# Altium PCB PCB1.PcbDoc
Units mil, origin at the board's own origin, x right, y up, seen from the top; angles counter-clockwise.
Board outline 2955 x 3545 mil, 2 copper layers (Top Layer, Bottom Layer); 51 components, 28 nets, 169 pads, 50 vias.
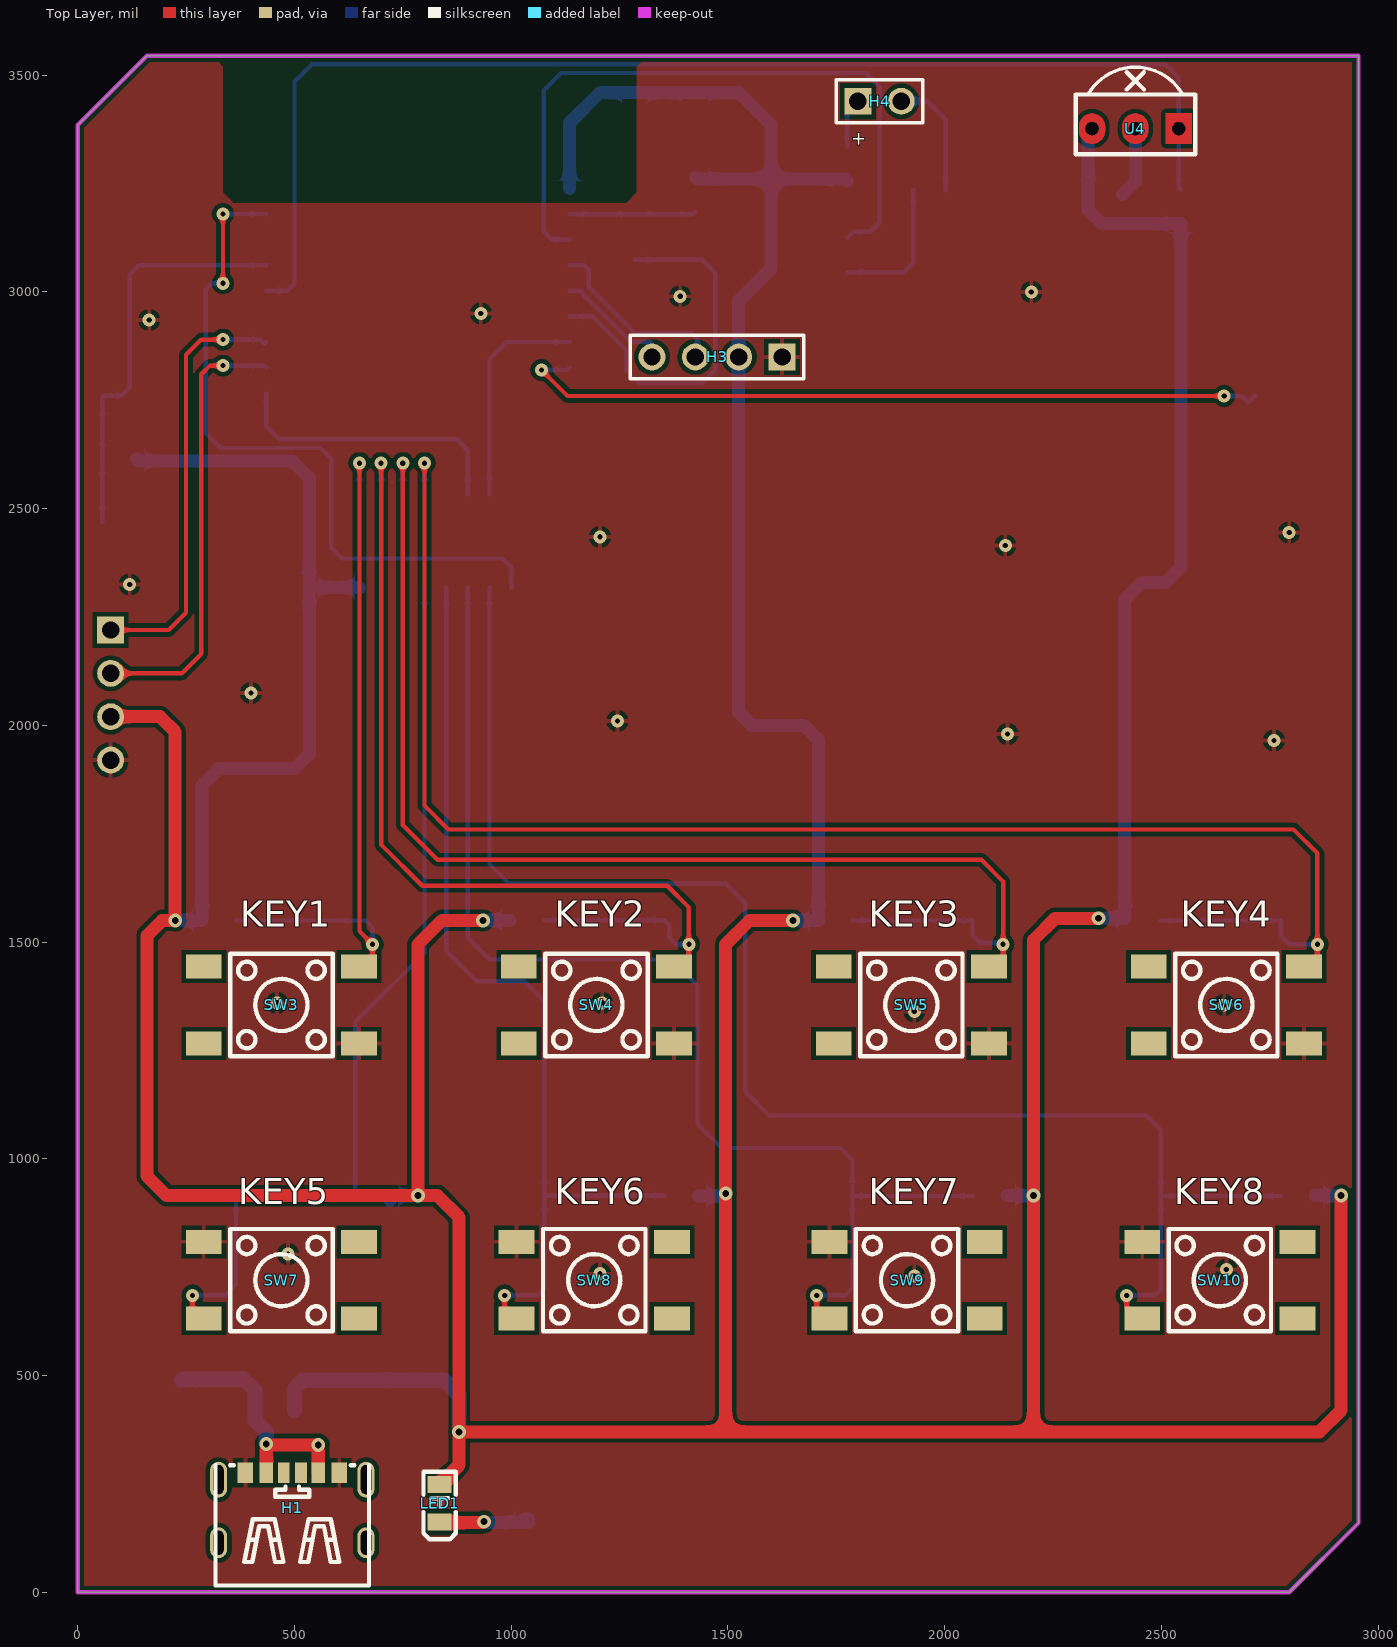
[diagram p0: Top Layer view]
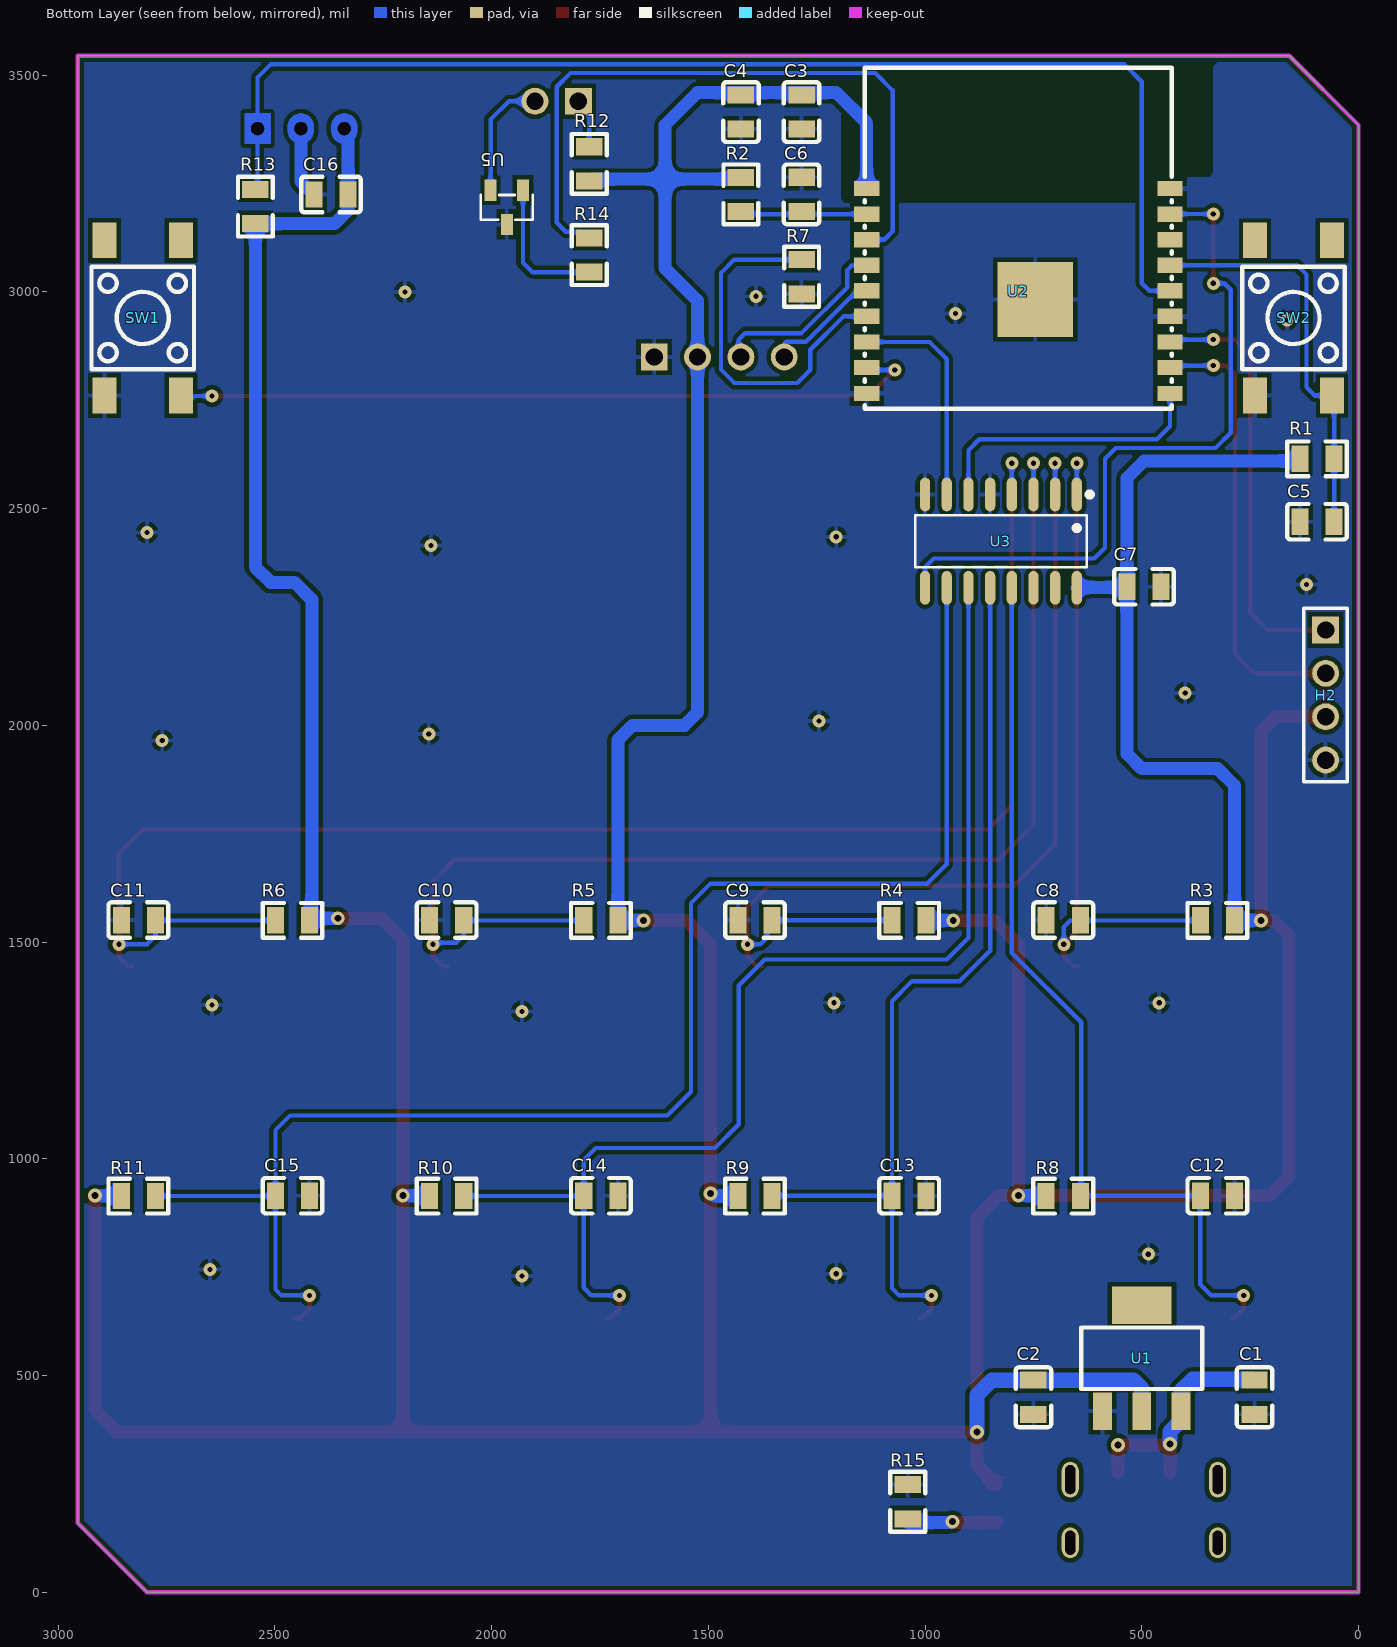
[diagram p1: Bottom Layer view, seen from below]

## Layer stack, top to bottom
Top Solder: solder mask 0.4, Solder Resist, Dk 3.5
Top Layer: signal copper 1.4
Dielectric 1: dielectric 12.6, FR-4, Dk 4.8
Bottom Layer: signal copper 1.4
Bottom Solder: solder mask 0.4, Solder Resist, Dk 3.5

## Board outline
0,0 0,3385 160,3545 2955,3545 2955,160 2795,0

## Design rules (kind name [scope] priority, off if disabled: settings)
Clearance [All] p1: gap=10 ignorepadtopadclearanceinfootprint=FALSE except(0: Arc-Hole Track-Hole SMDPad-Hole THPad-Hole Via-Hole Fill-Hole Poly-Hole Region-Hole Text-Hole)
ComponentClearance [All] p1: gap=0 collisioncheckmode=3 verticalgap=0 showdistances=FALSE
PolygonConnect [All] p1: connectstyle=Relief reliefconductorwidth=10 reliefentries=4 polygonreliefangle="90 Angle" airgapwidth=10
RoutingVias [All] p1: holewidth=12 width=30 viastyle="Through Hole" minholewidth=8 minwidth=24 maxholewidth=20 maxwidth=40
SilkToSilkClearance [All] p1: silktosilkclearance=0
SilkToSolderMaskClearance [IsPad] p1: minsilkscreentomaskgap=0 clearancetoexposedcopper=TRUE
SolderMaskExpansion [All] p1: expansion=4
Width [All] p1: maxlimit=50 minlimit=6 preferedwidth=10 minimp=50.000000 maximp=50.000000 favimp=50.000000
27 further rules are at their usual default settings.

## Components (designator, comment, footprint, x,y, rotation, side; value= is the part's Value field where it differs from the comment)
C1 "10uF" Capacity_0805_SMD 240,450 r90 bottom
C2 "10uF" Capacity_0805_SMD 750,450 r90 bottom
C3 "0.1uF" Capacity_0805_SMD 1285,3415 r90 bottom
C4 "10uF" Capacity_0805_SMD 1425,3415 r90 bottom
C5 "0.1uF" Capacity_0805_SMD 95.79,2470 r180 bottom
C6 "0.1uF" Capacity_0805_SMD 1285,3225.32 r270 bottom
C7 "0.1uF" Capacity_0805_SMD 495,2320 r180 bottom
C8 "0.1uF" Capacity_0805_SMD 681.26,1550.79 r180 bottom
C9 "0.1uF" Capacity_0805_SMD 1392.5,1550.79 r180 bottom
C10 "0.1uF" Capacity_0805_SMD 2103.75,1550.79 r180 bottom
C11 "0.1uF" Capacity_0805_SMD 2815,1550.79 r180 bottom
C12 "0.1uF" Capacity_0805_SMD 325.63,915 r0 bottom
C13 "0.1uF" Capacity_0805_SMD 1036.88,915 r0 bottom
C14 "0.1uF" Capacity_0805_SMD 1748.13,915 r0 bottom
C15 "0.1uF" Capacity_0805_SMD 2459.38,915 r0 bottom
C16 "0.1uF" Capacity_0805_SMD 2370.75,3224.83 r0 bottom
H1 "POWER" TYPEC_SMD_6P 495,195 r0 top
H2 "Download" Header_2.54_1X4_TH 75.89,2020 r270 bottom
H3 "OLED" Header_2.54_1X4_TH 1425,2850 r180 top
H4 "IR_EMIT" Header_2.54_1X2_TH 1850,3440 r0 top
LED1 "LED" LED_0805_SMD 835,205 r90 top
R1 "10K" Resistance_0805_SMD 95.79,2614.95 r0 bottom
R2 "10K" Resistance_0805_SMD 1425,3225 r90 bottom
R3 "10K" Resistance_0805_SMD 325.63,1550 r180 bottom
R4 "10K" Resistance_0805_SMD 1036.88,1550 r180 bottom
R5 "10K" Resistance_0805_SMD 1748.13,1550 r180 bottom
R6 "10K" Resistance_0805_SMD 2459.37,1550 r180 bottom
R7 "10K" Resistance_0805_SMD 1285,3035 r270 bottom
R8 "10K" Resistance_0805_SMD 681.25,914.21 r0 bottom
R9 "10K" Resistance_0805_SMD 1392.5,914.21 r0 bottom
R10 "10K" Resistance_0805_SMD 2103.75,914.21 r0 bottom
R11 "10K" Resistance_0805_SMD 2815,914.21 r0 bottom
R12 "220R" Resistance_0805_SMD 1775,3295.63 r270 bottom
R13 "10K" Resistance_0805_SMD 2545.12,3196.88 r90 bottom
R14 "1K" Resistance_0805_SMD 1775,3085 r90 bottom
R15 "220R" Resistance_0805_SMD 1040,208.93 r270 bottom
SW1 "BOOT" SW_6.0*6.0_SMD 2805,2940 r270 bottom
SW2 "RST" SW_6.0*6.0_SMD 150,2940 r270 bottom
SW3 "KEY1" SW_6.0*6.0_SMD 470,1355 r0 top
SW4 "KEY2" SW_6.0*6.0_SMD 1196.67,1355 r0 top
SW5 "KEY3" SW_6.0*6.0_SMD 1923.33,1355 r0 top
SW6 "KEY4" SW_6.0*6.0_SMD 2650,1355 r0 top
SW7 "KEY5" SW_6.0*6.0_SMD 470,720 r180 top
SW8 "KEY6" SW_6.0*6.0_SMD 1191.67,720 r180 top
SW9 "KEY7" SW_6.0*6.0_SMD 1913.33,720 r180 top
SW10 "KEY8" SW_6.0*6.0_SMD 2635,720 r180 top
U1 "AMS1117" AMS1117 500,540 r270 bottom
U2 "ESP_WROOM_02" ESP_WROOM_02 785,3002.12 r180 bottom
U3 "74LS148D" SOIC-16 825,2425 r0 bottom
U4 "VS1838B" VS1838B 2440.12,3376.88 r180 top
U5 "S9012" SOT-23 1965,3195 r90 bottom

## Footprints (in the part's own frame and the unit in brackets; to place one, negate y for a bottom-side part, rotate by r counter-clockwise, add the part's x,y. Pads: shape width x height; smd on the part's side, far side on the other; paste and mask are expansions set on the pad)
AMS1117 [mm]
  rect 2.2x1.1 smd: 1(3.099,-2.3) 2(3.099,0) 3(3.099,2.3)
  rect 2.2x3.5 smd: 4(-3.099,0)
  silkscreen extent -1.8,-3.55 1.8,3.55
Capacity_0805_SMD [mm]
  rect 1x1.55 smd: 1(-1,0) 2(1,0)
  silkscreen extent -1.75,-1.04 1.75,1.04
ESP_WROOM_02 [mil]
  rect 58.5x35.4 smd: 1(-350,236.5) 2(-350,177.5) 3(-350,118.5) 4(-350,59.5) 5(-350,0.5) 6(-350,-58.5) 7(-350,-117.5) 8(-350,-176.5) 9(-350,-236.5) 10(350,-236.5) 11(350,-176.5) 12(350,-117.5) 13(350,-58.5) 14(350,0.5) 15(350,59.5) 16(350,118.5) 17(350,177.5) 18(350,236.5)
  rect 173.23x173.23 smd: 19(39.04,-19.53)
  silkscreen extent -354,-272 354,516
Header_2.54_1X2_TH [mil]
  rect 62x62 hole 40.16: 1(-50,0)
  round 62 hole 40.16: 2(50,0)
  silkscreen extent -100,-50 100,50
Header_2.54_1X4_TH [mil]
  rect 62x62 hole 40.16: 1(-200,0)
  round 62 hole 40.16: 2(-100,0) 3(0,0) 4(100,0)
  silkscreen extent -250,-50 150,50
LED_0805_SMD [mm]
  rect 1x1.4 smd: 1(1.1,0) 2(-1.1,0)
  silkscreen extent -2.1,-0.95 1.85,0.95
Resistance_0805_SMD [mm]
  rect 1x1.55 smd: 1(-1,0) 2(1,0)
  silkscreen extent -1.75,-1.02 1.75,1.02
SOIC-16 [mil]
  oval 23.7x77.6 smd: 1(-175,-107.7) 2(-125,-107.7) 3(-75,-107.7) 4(-25,-107.7) 5(25,-107.7) 6(75,-107.7) 7(125,-107.7) 8(175,-107.7) 9(175,107.7) 10(125,107.7) 11(75,107.7) 12(25,107.7) 13(-25,107.7) 14(-75,107.7) 15(-125,107.7) 16(-175,107.7)
  silkscreen extent -211,-114 198,60
SOT-23 [mm]
  rect 1.25x0.7 smd: 1(1,-0.95) 2(1,0.95) 3(-1,0)
  silkscreen extent -0.73,-1.53 0.73,1.53
SW_6.0*6.0_SMD [mm]
  rect 2.1x1.4 smd: 1(-4.55,2.25) 2(4.55,2.25) 3(-4.55,-2.25) 4(4.55,-2.25)
  silkscreen extent -3,-3 3,3
TYPEC_SMD_6P [mm]
  oval 1x2.1 hole 0.6 slot 1.7 at 90 deg: 1(-4.32,1.65) 2(4.32,1.65)
  oval 1x1.8 hole 0.6 slot 1.4 at 90 deg: 3(-4.32,-2.05) 4(4.32,-2.05)
  rect 0.7x1.2 smd: A5(-0.5,2.05) B5(0.5,2.05)
  rect 0.8x1.2 smd: A9(1.52,2.05) B9(-1.52,2.05)
  rect 0.9x1.2 smd: A12(2.75,2.05) B12(-2.75,2.05)
  silkscreen extent -4.5,-4.55 4.5,2.49
VS1838B [mil]
  round 0 hole 30 slot 30.2 at 0 deg: 1(-100,0) 2(0,0) 3(100,0)
  Top Layer region: 30,-5 29.76,-8.76 29.06,-12.46 27.89,-16.04 26.29,-19.45 24.27,-22.63 21.87,-25.54 19.12,-28.12 16.07,-30.33 12.77,-32.14 9.27,-33.53 5.62,-34.47 1.88,-34.94 -1.88,-34.94 -5.62,-34.47 -9.27,-33.53 -12.77,-32.14 -16.07,-30.33 -19.12,-28.12 -21.87,-25.54 -24.27,-22.63 -26.29,-19.45 -27.89,-16.04 -29.06,-12.46 -29.76,-8.76 -30,-5 -30,5 -29.76,8.76 -29.06,12.46 -27.89,16.04 -26.29,19.45 -24.27,22.63 -21.87,25.54 -19.12,28.12 -16.07,30.33 -12.77,32.14 -9.27,33.53 -5.62,34.47 -1.88,34.94 1.88,34.94 5.62,34.47 9.27,33.53 12.77,32.14 16.07,30.33 19.12,28.12 21.87,25.54 24.27,22.63 26.29,19.45 27.89,16.04 29.06,12.46 29.76,8.76 30,5
  Top Layer region: -130,35 -70,35 -70,-35 -130,-35
  Top Layer region: 130,-5 129.76,-8.76 129.06,-12.46 127.89,-16.04 126.29,-19.45 124.27,-22.63 121.87,-25.54 119.12,-28.12 116.07,-30.33 112.77,-32.14 109.27,-33.53 105.62,-34.47 101.88,-34.94 98.12,-34.94 94.38,-34.47 90.73,-33.53 87.23,-32.14 83.93,-30.33 80.88,-28.12 78.13,-25.54 75.73,-22.63 73.71,-19.45 72.11,-16.04 70.94,-12.46 70.24,-8.76 70,-5 70,5 70.24,8.76 70.94,12.46 72.11,16.04 73.71,19.45 75.73,22.63 78.13,25.54 80.88,28.12 83.93,30.33 87.23,32.14 90.73,33.53 94.38,34.47 98.12,34.94 101.88,34.94 105.62,34.47 109.27,33.53 112.77,32.14 116.07,30.33 119.12,28.12 121.87,25.54 124.27,22.63 126.29,19.45 127.89,16.04 129.06,12.46 129.76,8.76 130,5
  Bottom Layer region: 30,-5 29.76,-8.76 29.06,-12.46 27.89,-16.04 26.29,-19.45 24.27,-22.63 21.87,-25.54 19.12,-28.12 16.07,-30.33 12.77,-32.14 9.27,-33.53 5.62,-34.47 1.88,-34.94 -1.88,-34.94 -5.62,-34.47 -9.27,-33.53 -12.77,-32.14 -16.07,-30.33 -19.12,-28.12 -21.87,-25.54 -24.27,-22.63 -26.29,-19.45 -27.89,-16.04 -29.06,-12.46 -29.76,-8.76 -30,-5 -30,5 -29.76,8.76 -29.06,12.46 -27.89,16.04 -26.29,19.45 -24.27,22.63 -21.87,25.54 -19.12,28.12 -16.07,30.33 -12.77,32.14 -9.27,33.53 -5.62,34.47 -1.88,34.94 1.88,34.94 5.62,34.47 9.27,33.53 12.77,32.14 16.07,30.33 19.12,28.12 21.87,25.54 24.27,22.63 26.29,19.45 27.89,16.04 29.06,12.46 29.76,8.76 30,5
  Bottom Layer region: -130,35 -70,35 -70,-35 -130,-35
  Bottom Layer region: 130,-5 129.76,-8.76 129.06,-12.46 127.89,-16.04 126.29,-19.45 124.27,-22.63 121.87,-25.54 119.12,-28.12 116.07,-30.33 112.77,-32.14 109.27,-33.53 105.62,-34.47 101.88,-34.94 98.12,-34.94 94.38,-34.47 90.73,-33.53 87.23,-32.14 83.93,-30.33 80.88,-28.12 78.13,-25.54 75.73,-22.63 73.71,-19.45 72.11,-16.04 70.94,-12.46 70.24,-8.76 70,-5 70,5 70.24,8.76 70.94,12.46 72.11,16.04 73.71,19.45 75.73,22.63 78.13,25.54 80.88,28.12 83.93,30.33 87.23,32.14 90.73,33.53 94.38,34.47 98.12,34.94 101.88,34.94 105.62,34.47 109.27,33.53 112.77,32.14 116.07,30.33 119.12,28.12 121.87,25.54 124.27,22.63 126.29,19.45 127.89,16.04 129.06,12.46 129.76,8.76 130,5
  silkscreen extent -138,-142 138,59

## Part data
C1 C2 C3 C4 C5 C6 C7 C8 C9 C10 C11 C12 C13 C14 C15 C16: library part Cap0805
H1: library part TYPEC_6P_SMD
H2 H3: library part Header_2.54mm_1X4_TH
H4: library part Header_2.54mm_1X2_TH
LED1: library part LED0805
R1 R2 R3 R4 R5 R6 R7 R8 R9 R10 R11 R12 R13 R14 R15: library part Res0805
SW1 SW2 SW3 SW4 SW5 SW6 SW7 SW8 SW9 SW10: library part Key_6.0X6.0
U5: library part S9012_PNP

## Via types
v1: diameter 30, hole 12, Top Layer to Bottom Layer, tented both sides, 38 vias
v2: diameter 32, hole 16, Top Layer to Bottom Layer, tented both sides, 12 vias

## Nets (pads, with @x,y where several pads share a name; then routed paths per layer and width w, separated by ;. In a path a pad name is that pad's centre, name@x,y a point inside that pad or via, vN(x,y) a via of type N, cw(c..) or ccw(c..) an arc to the next point about the centre after c; other vN are vias at no path point)
3V3: C2.2 C3.2 C4.2 C7.1 C16.1 H2.3 H3.2 LED1.1 R1.2 R2.2 R3.2 R4.2 R5.2 R6.2 R8.2 R9.2 R10.2 R11.2 R12.2 R13.1 U1.2 U2.1 U3.16 U4.3 | length 16500.2
  Top Layer w30: H2.3 190,2020 225,1985 v2(225,1550) 195,1550 160,1515 160,960 205,915 v2(785,915) ; LED1.1 842.87,248.3 852.56,257.99 852.56,265.86 880,293.3 v2(880,370) ; v2(935,1550) 840,1550 785,1495 v2(785,915) ; v2(1650,1550) 1550,1550 1495,1495 v2(1495,920) 1495,370 ; v2(2355,1555) 2255,1555 2205,1505 v2(2205,915) 2205,370 ; v2(2915,915) 2915,420 2865,370 2205,370 ; v2(785,915) 830,915 880,865 v2(880,370) ; v2(880,370) 1495,370 ; 1495,370 2205,370
  Bottom Layer w20: R10.2 R10.2@2143.91,915 ; R11.2 R11.2@2855.16,915
  Bottom Layer w30: R1.2 135.16,2614.68 139.84,2610 495,2610 534.37,2570.63 C7.1 ; v2(225,1550) R3.2 286.26,1861.26 325,1900 500,1900 534.37,1934.37 C7.1 ; U3.16 648.65,2318.65 535.72,2318.65 C7.1 ; R8.2@720.62,903.38 R8.2 721.41,915 v2(785,915) ; v2(935,1550) R4.2 ; U2.1 1135,3390 1205,3460 1525,3460 1600,3385 1600,3260.32 ; R2.2 1429.05,3260.32 1600,3260.32 ; R9.2 1485.96,914.21 1491.75,920 v2(1495,920) ; v2(1650,1550) R5.2 1708.76,1966.24 1675,2000 1555,2000 1525,2030 H3.2 1525,2980 1600,3055 1600,3260.32 ; R12.2 1770.94,3260.32 1600,3260.32 ; R10.2@2143.91,915 v2(2205,915) ; U4.3 2331.38,3368.14 C16.1 2331.38,3188.62 2362.49,3157.51 R13.1 2545.12,2365.12 2510,2330 2455,2330 2415,2290 2415,1555 v2(2355,1555) ; R11.2@2855.16,915 v2(2915,915)
  Bottom Layer w35: U1.2 500,470 519.37,489.37 C2.2 845.63,489.37 880,455 v2(880,370)
BOOT: SW1.2 U2.8 | length 1751.4
  Top Layer w10: v1(1070,2820) 1130,2760 v1(2645,2760)
  Bottom Layer w10: v1(1070,2820) 1129.38,2820 U2.8 ; v1(2645,2760) 2685.55,2760 2700.55,2745 SW1.2
EN: C6.2 R2.1 U2.2 | length 292.5
  Bottom Layer w10: U2.2 1418.99,3179.62 R2.1
GND: C1.1 C2.1 C3.1 C4.1 C5.1 C6.1 C7.2 C8.1 C9.1 C10.1 C11.1 C12.1 C13.1 C14.1 C15.1 C16.2 H1.A12 H1.B12 H2.4 H3.1 R7.2 R15.1 SW1.4 SW2.4 SW3.4 SW4.4 SW5.4 SW6.4 SW7.4 SW8.4 SW9.4 SW10.4 U1.1 U2.9 U2.13 U2.18 U2.19 U3.5 U3.8 U4.2 U5.3 | length 175.3
  Bottom Layer w10: C16.2 C16.2@2410.12,3235.66
  Bottom Layer w30: C16.2 2440.12,3254.83 U4.2
  other v1: 1930,730 1205,735 2650,745 485,780 1930,1340 2645,1355 460,1360 1210,1360 2760,1965 2145,1980 1245,2010 400,2075 120,2325 2140,2415 1205,2435 2795,2445 165,2935 930,2950 1390,2990 2200,3000
IIC_SCL: H3.3 U2.4 | length 431.6
  Bottom Layer w10: U2.4 1168.38,3061.62 1179.25,3050.75 1179.25,3010.75 1285,2905 1415,2905 1430,2890 1430,2855 H3.3
IIC_SDA: H3.4 U2.5 | length 270.8
  Bottom Layer w10: U2.5 1157.38,3002.62 1275,2885 1320,2885 1325,2880 H3.4
IR_READ: R13.2 U2.14 U4.1 | length 2867.1
  Bottom Layer w10: U2.14 482.62,3002.62 500,3020 500,3485 540,3525 2510,3525 2540.12,3494.88 U4.1 2540.12,3241.25 R13.2
IR_WRITE: R14.2 U2.3 | length 1600.7
  Bottom Layer w10: U2.3 1094.38,3120.62 1075,3140 1075,3465 1115,3505 1818.21,3505 1850,3473.21 1850,3160 1829.06,3139.05 1789.69,3139.05 R14.2
KEY1: C8.2 R3.1 SW3.2 U3.1 | length 1625
  Top Layer w10: SW3.2 657.44,1443.58 680,1466.14 v1(680,1495) 650,1525 v1(650,2605)
  Bottom Layer w10: R3.1 665,1550 680,1535 v1(680,1495) ; U3.1 v1(650,2605)
KEY2: C9.2 R4.1 SW4.2 U3.2 | length 2253.9
  Top Layer w10: v1(700,2605) 700,1725 795,1630 1360,1630 1410,1580 v1(1410,1495) 1410,1466.14 1387.44,1443.58 SW4.2
  Bottom Layer w10: U3.2 v1(700,2605) ; R4.1 1077.04,1550.79 C9.2 1365,1538.92 1365,1510 1380,1495 v1(1410,1495)
KEY3: C10.2 R5.1 SW5.2 U3.3 | length 2953.4
  Top Layer w10: v1(750,2605) 750,1770 830,1690 2085,1690 2135,1640 v1(2135,1495) 2135,1466.14 2112.44,1443.58 SW5.2
  Bottom Layer w10: U3.3 v1(750,2605) ; R5.1 2063.59,1550 C10.2 2064.38,1515.62 2081.17,1498.83 2131.17,1498.83 v1(2135,1495)
KEY4: C11.2 R6.1 SW6.2 U3.4 | length 3653
  Top Layer w10: v1(800,2605) 800,1815 855,1760 2805,1760 2860,1705 v1(2860,1495) 2860,1466.14 2837.44,1443.58 SW6.2
  Bottom Layer w10: U3.4 v1(800,2605) ; R6.1 2774.84,1550 C11.2 2775.63,1514.37 2795,1495 v1(2860,1495)
KEY5: C12.2 R8.1 SW7.2 U3.13 | length 2126.7
  Top Layer w10: v1(265,685) 265,653.98 287.56,631.42 SW7.2
  Bottom Layer w10: v1(265,685) 340,685 365,710 C12.2 641.1,915 640,916.1 640,1315 800,1475 U3.13
KEY6: C13.2 R9.1 SW8.2 U3.12 | length 2217.3
  Top Layer w10: v1(985,685) 985,653.98 1007.56,631.42 SW8.2
  Bottom Layer w10: U3.12 850,1480 920,1410 1030,1410 1076.25,1363.75 C13.2 ; v1(985,685) 1060,685 1076.25,701.25 C13.2 ; R9.1 1352.34,915 C13.2
KEY7: C14.2 R10.1 SW9.2 U3.11 | length 2826.1
  Top Layer w10: v1(1705,685) 1705,653.98 1727.56,631.42 SW9.2
  Bottom Layer w10: U3.11 900,1510 950,1460 1370,1460 1430,1400 1430,1080 1485,1025 1759.99,1025 1787.5,997.5 C14.2 ; v1(1705,685) 1770,685 1787.5,702.5 C14.2 ; R10.1 1788.29,914.21 C14.2
KEY8: C15.2 R11.1 SW10.2 U3.10 | length 3500.5
  Top Layer w10: v1(2420,685) 2420,653.98 2442.56,631.42 SW10.2
  Bottom Layer w10: U3.10 950,1680 995,1635 1495,1635 1540,1590 1540,1155 1595,1100 2465,1100 2498.75,1066.25 C15.2 ; v1(2420,685) 2485,685 2498.75,698.75 C15.2 ; R11.1 2499.53,914.21 C15.2
NetC1_2: C1.2 H1.A9 H1.B9 U1.3 | length 566.9
  Top Layer w20: H1.A9 H1.A9@554.92,275.79 ; v2@554.92,339.92 v2(555,340)
  Top Layer w30: H1.B9 v2(435,342.5) 435.54,342.5 438.04,340 v2(555,340) ; H1.A9@554.92,275.79 v2@554.92,339.92
  Bottom Layer w35: C1.2 242.18,491.56 383.45,491.56 409.45,465.55 U1.3 409.45,396.35 435,370.8 v2(435,342.5)
NetH4_1: H4.1 R12.1 | length 115.4
  Bottom Layer w10: R12.1 1775,3415 H4.1
NetH4_2: H4.2 U5.2 | length 283.2
  Bottom Layer w10: H4.2 1960,3440 2002.4,3397.6 U5.2
NetLED1_2: LED1.2 R15.2 | length 216
  Top Layer w30: LED1.2 835.85,160.85 935.22,160.85 v2(937.18,162.82)
  Bottom Layer w30: v2(937.18,162.82) 940.43,162.82 942.62,160.63 R15.2@1040,160.63 ; R15.2@1031.07,169.57 R15.2
NetR7_1: R7.1 U2.6 | length 861.4
  Bottom Layer w10: U2.6 1188.09,2943.62 1265,2866.72 1265,2820 1295,2790 1440,2790 1471,2821 1471,3044 1440.63,3074.37 R7.1
NetR14_1: R14.1 U5.1 | length 328.5
  Bottom Layer w10: R14.1 1905.63,3045.63 1927.6,3067.6 U5.1
OUT0: U2.17 U3.9 | length 1644.6
  Top Layer w10: v1@330,3180 335,3175 v1(335,3020)
  Bottom Layer w10: v1@330,3180 434.62,3180 U2.17 ; v1(335,3020) 310,3020 295,3005 295,2675 330,2640 560,2640 585,2615 585,2410 610,2385 980,2385 1000,2365 U3.9
  other v1: 335,3180
OUT1: U2.7 U3.7 | length 513.7
  Bottom Layer w10: U3.7 950,2845 989.62,2884.62 U2.7
OUT2: U2.10 U3.6 | length 665.7
  Bottom Layer w10: U2.10 435,2690 465,2660 875,2660 900,2635 U3.6
RST: C5.2 R1.1 SW2.2 U2.15 | length 943.4
  Bottom Layer w10: C5.2 R1.1 56.42,2755.87 SW2.2 100.87,2760.87 120,2780 120,3040 141.62,3061.62 U2.15
RX: H2.2 U2.11 | length 1032.8
  Top Layer w10: H2.2 240,2120 285,2165 285,2810 305,2830 v1(335,2830)
  Bottom Layer w10: v1(335,2830) 430.62,2830 U2.11
TX: H2.1 U2.12 | length 991.2
  Top Layer w10: H2.1 210,2220 250,2260 250,2855 285,2890 v1@330,2890
  Bottom Layer w10: v1@330,2890 420.38,2890 430.38,2880 U2.12
  other v1: 335,2890
pads on no net: H1.1 H1.2 H1.3 H1.4 H1.A5 H1.B5 SW1.1 SW1.3 SW2.1 SW2.3 SW3.1 SW3.3 SW4.1 SW4.3 SW5.1 SW5.3 SW6.1 SW6.3 SW7.1 SW7.3 SW8.1 SW8.3 SW9.1 SW9.3 SW10.1 SW10.3 U1.4 U2.16 U3.14 U3.15

## Polygon pours and split planes (outlines as drawn)
GND on Top Layer (solid, pour order 6): 160,3545 310,3545 335,3520 335,3230 360,3205 1265,3205 1290,3230 1290,3520 1315,3545 2955,3545 2955,160 2795,0 0,0 0,3385
no net on Top Layer "Top Layer-No Net" (solid, pour order 0): -50,3250
GND on Bottom Layer (solid, pour order 10): 160,3545 0,3385 0,0 2795,0 2955,160 2955,3545 1220,3545 1195,3520 1195,3215 1185,3205 485,3205 475,3215 475,3255 465,3265 345,3265 335,3275 335,3520 310,3545

## Keep-outs
Keep-Out Layer:
  the board outline again, w10

## Silkscreen, mask and mechanical layers (free items; w line width, h text height)
Top Overlay:
  text "+" at 1785,3340 h30
  text "KEY1" at 375,1535 h60
  text "KEY2" at 1100,1535 h60
  text "KEY3" at 1825,1535 h60
  text "KEY4" at 2545,1535 h60
  text "KEY5" at 370,895 h60
  text "KEY6" at 1100,895 h60
  text "KEY7" at 1825,895 h60
  text "KEY8" at 2530,895 h60
Mechanical 1:
  the board outline again, w10